# Altium PCB Version2AutoBanlancingRobot.PcbDoc
Units mil, origin at the board's own origin, x right, y up, seen from the top; angles counter-clockwise.
Board outline 2550 x 2885 mil, 2 copper layers (Top Layer, Bottom Layer); 34 components, 29 nets, 167 pads, 6 vias.
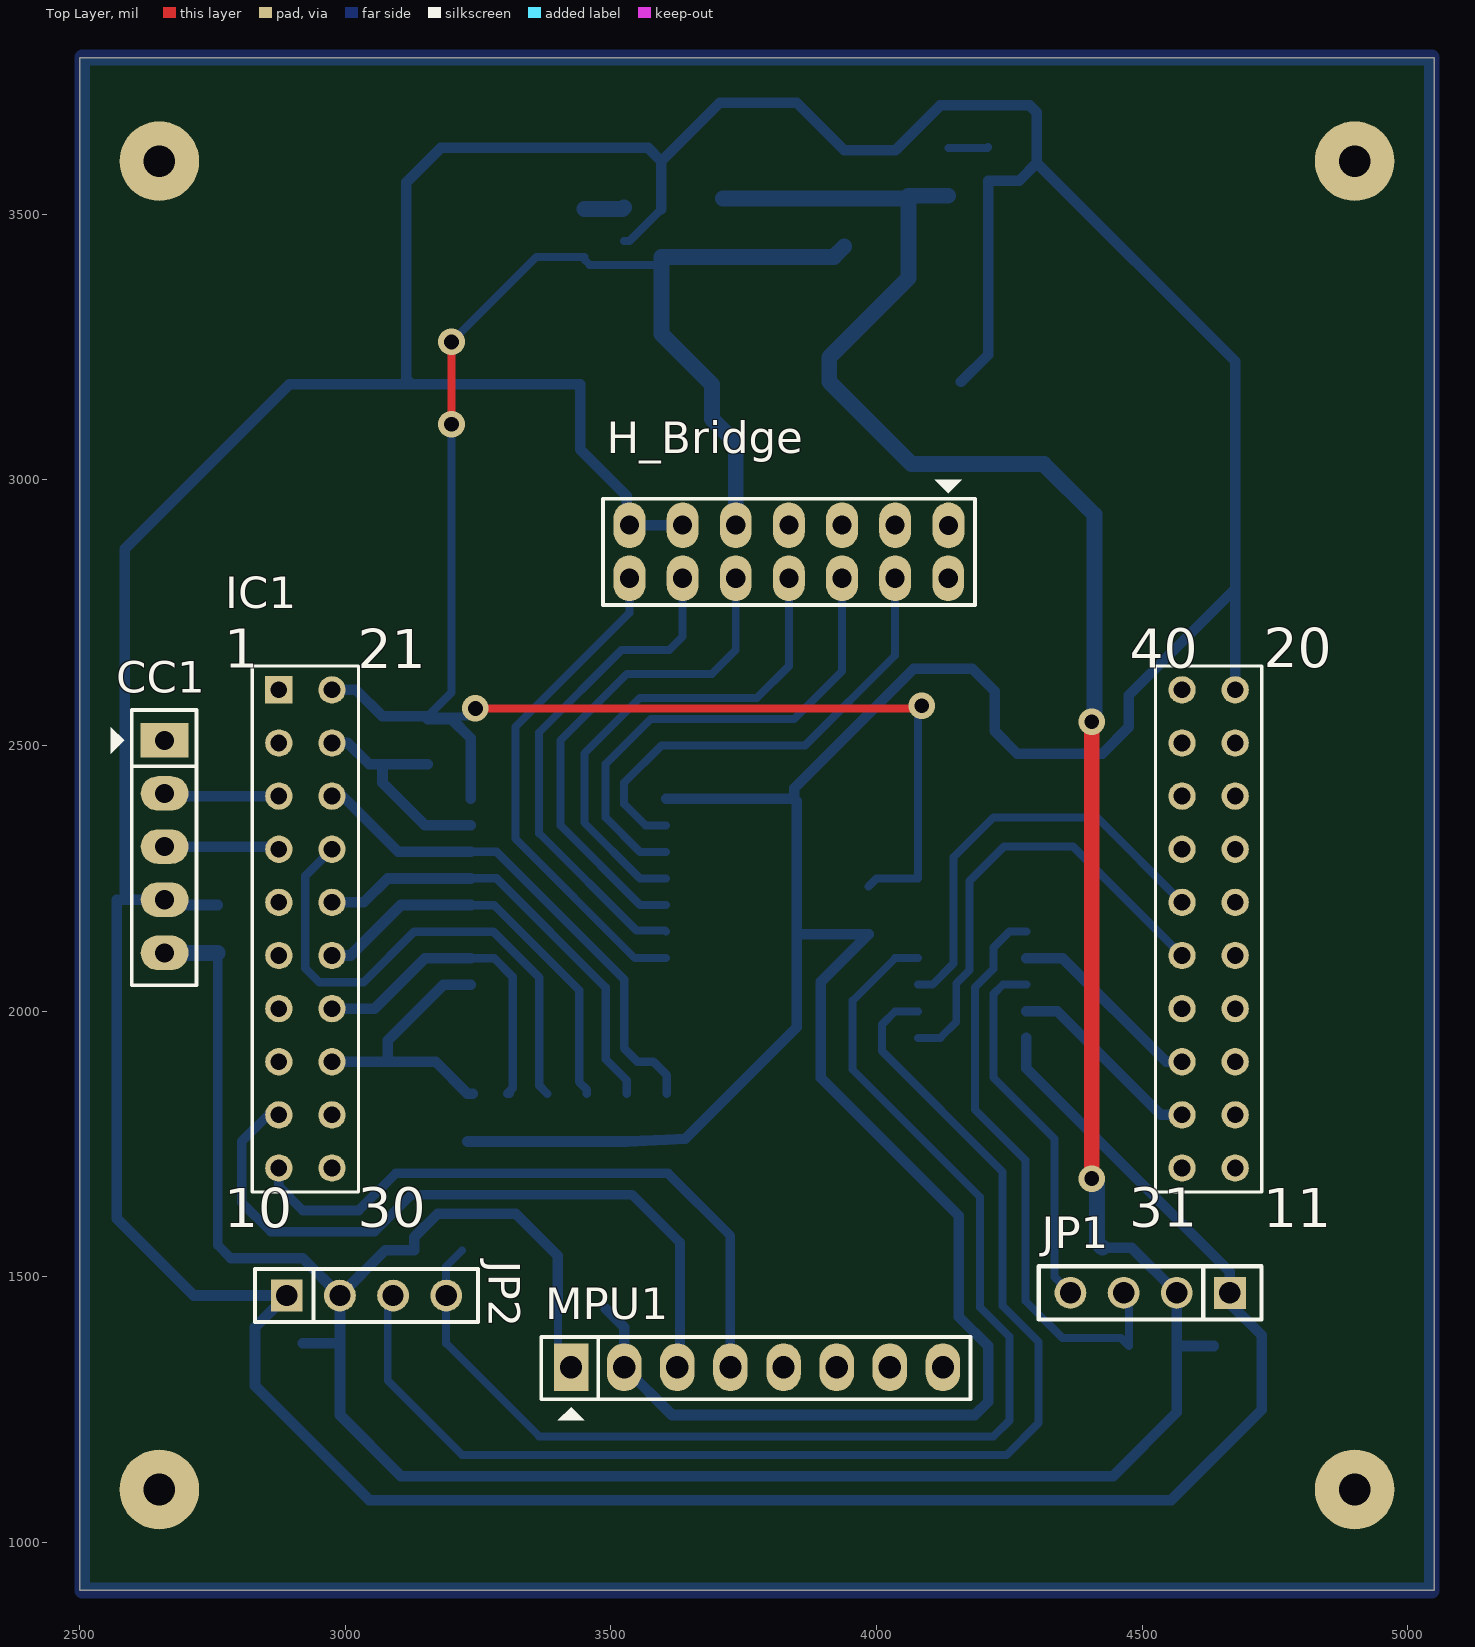
[diagram p0: Top Layer view]
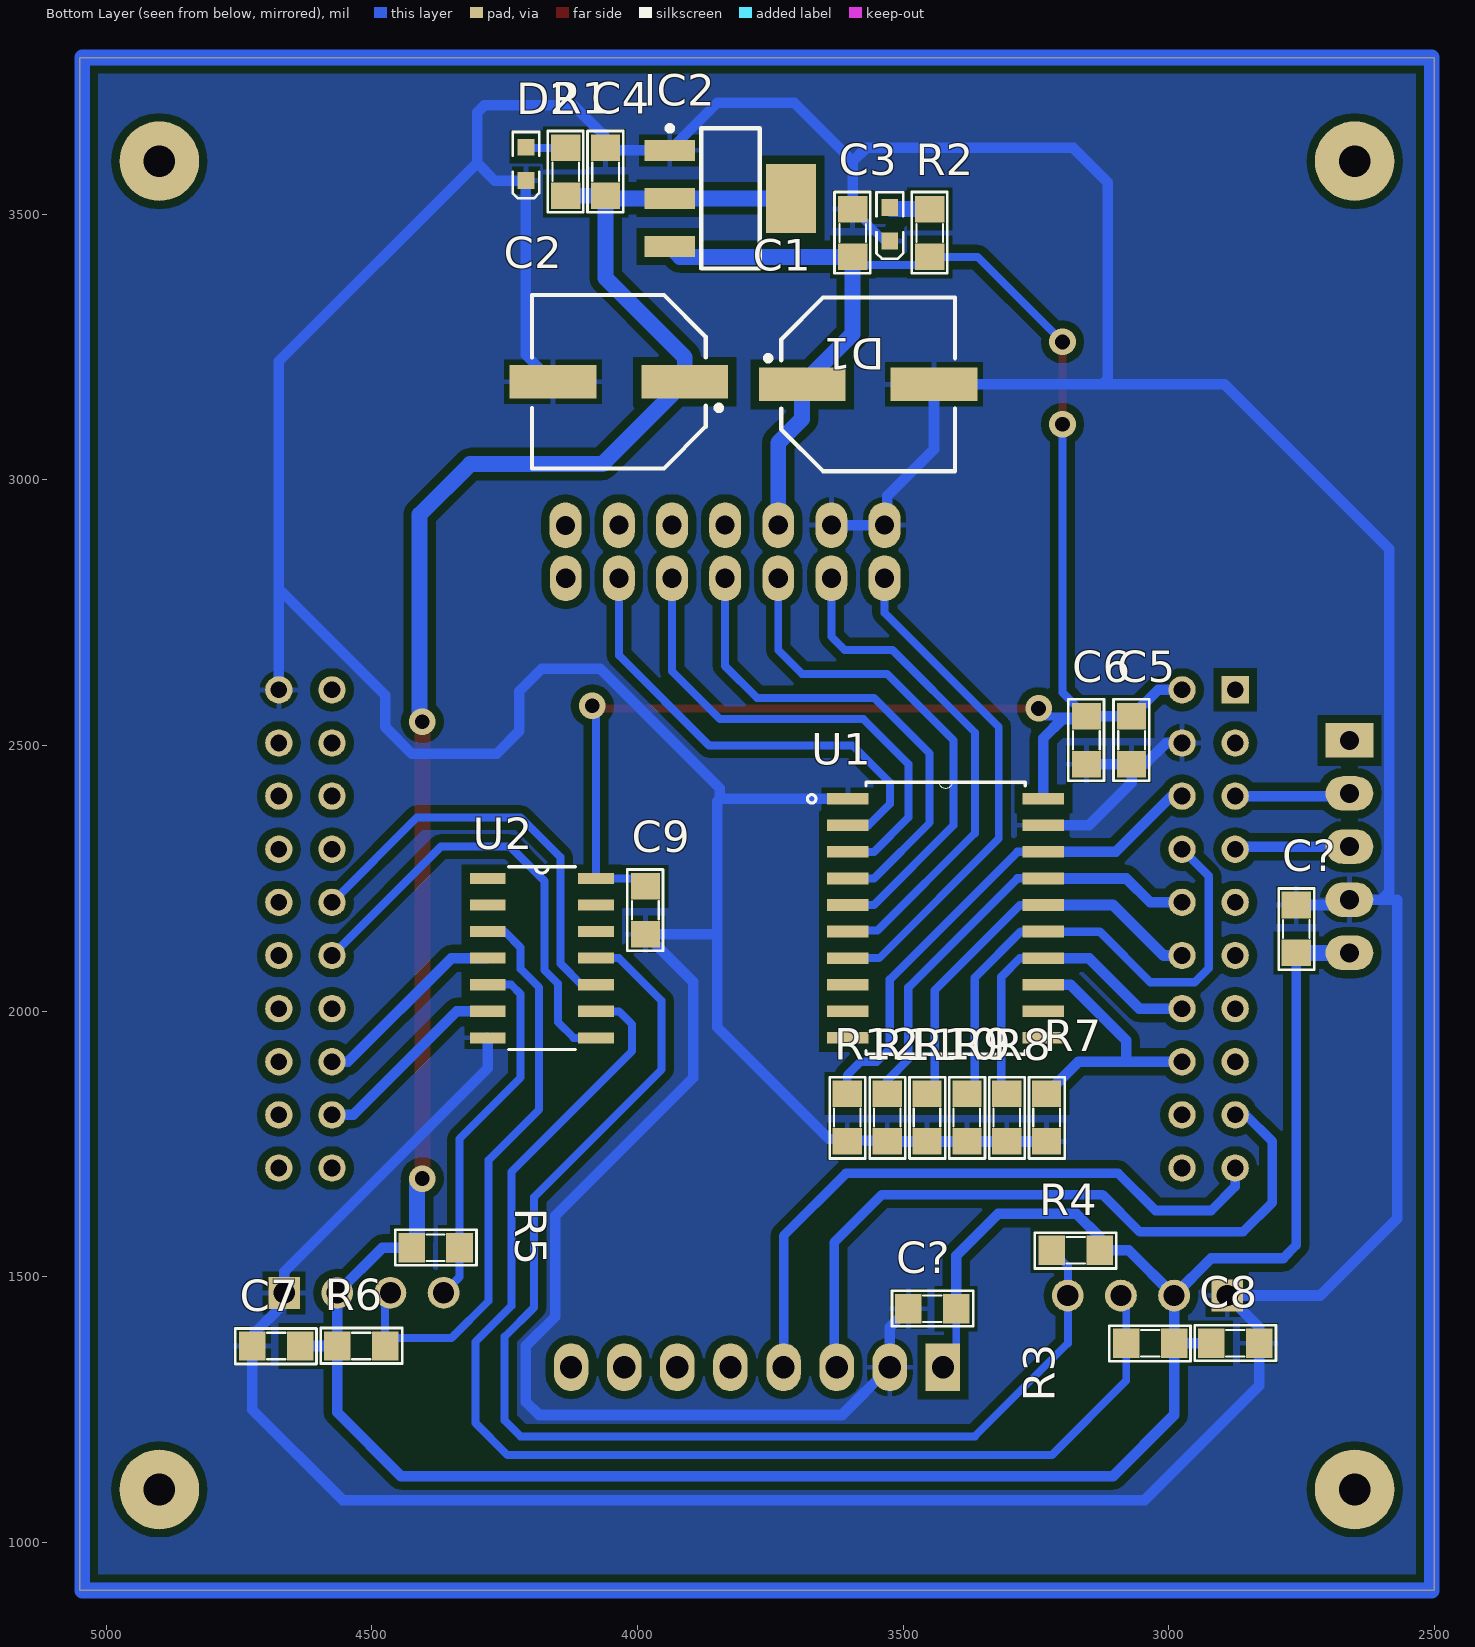
[diagram p1: Bottom Layer view, seen from below]
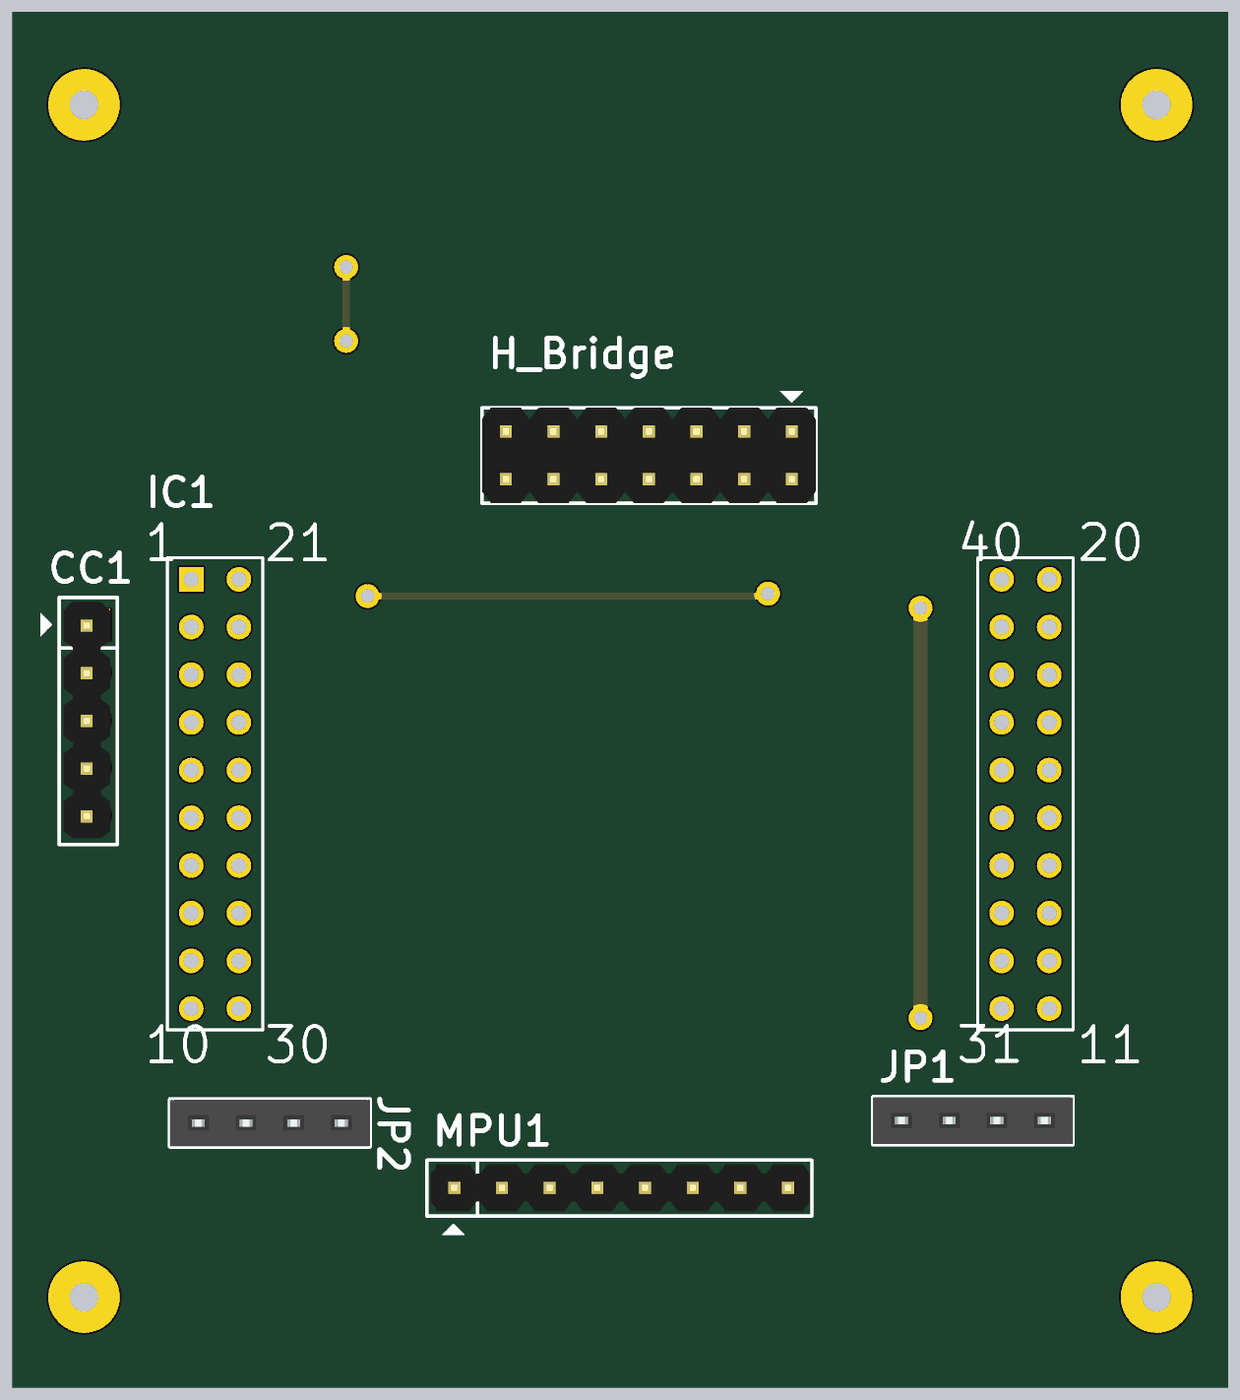
[diagram p2: 3D render of the assembled board from above, using the file's embedded part models]
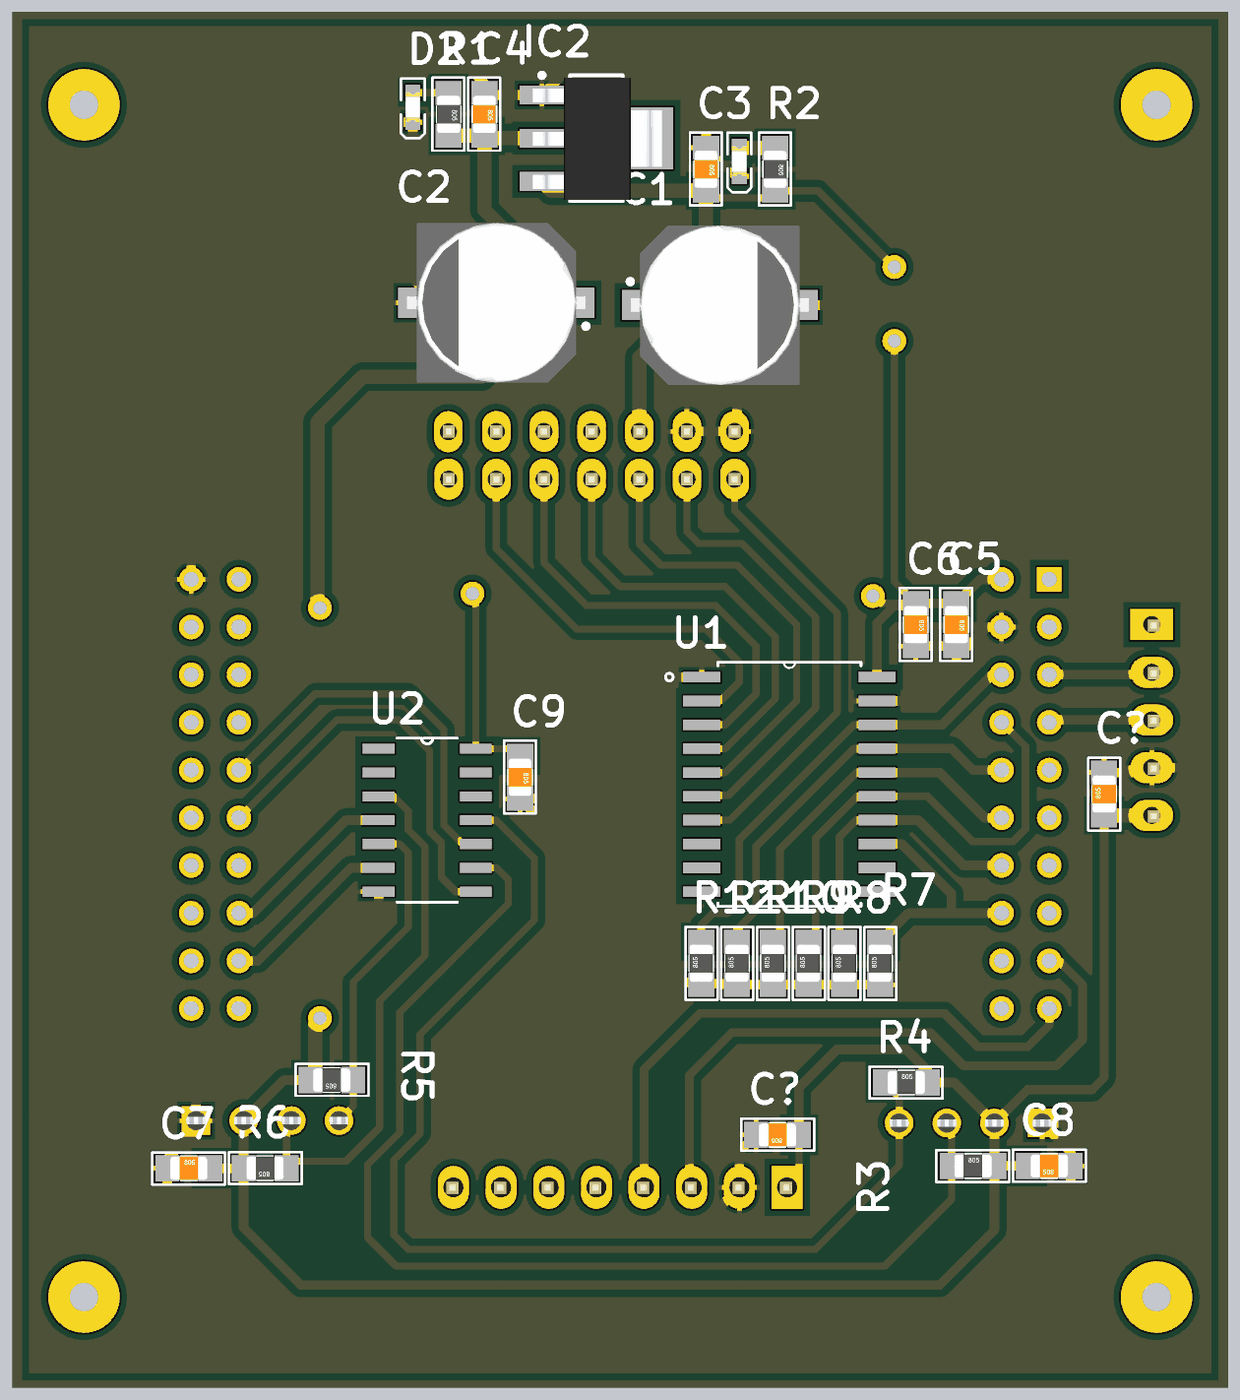
[diagram p3: 3D render of the assembled board from below, using the file's embedded part models]

## Layer stack, top to bottom
Top Solder: solder mask 0.4, Solder Resist, Dk 3.5
Top Layer: signal copper 1.4
Dielectric 1: dielectric 12.6, FR-4, Dk 4.8
Bottom Layer: signal copper 1.4
Bottom Solder: solder mask 0.4, Solder Resist, Dk 3.5

## Board outline
2500,910 2500,3795 5050,3795 5050,910

## Design rules (kind name [scope] priority, off if disabled: settings)
Clearance [All] p1: gap=13 ignorepadtopadclearanceinfootprint=FALSE
PolygonConnect [All] p1: connectstyle=Relief reliefconductorwidth=10 reliefentries=4 polygonreliefangle="90 Angle" airgapwidth=10
RoutingVias [All] p1: holewidth=28 width=50 viastyle="Through Hole" minholewidth=28 minwidth=50 maxholewidth=28 maxwidth=50
SolderMaskExpansion [All] p1: expansion=4
Width [All] p1: maxlimit=30 minlimit=15 preferedwidth=20 minimp=50.000000 maximp=50.000000 favimp=50.000000
30 further rules are at their usual default settings.

## Components (designator, comment, footprint, x,y, rotation, side; value= is the part's Value field where it differs from the comment)
C1 "Cap Pol SMD" "CAP ALU SIZE C" 3565.98,3180 r180 bottom value=100uF
C2 "Cap Pol SMD" "CAP ALU SIZE C" 4035,3185 r0 bottom value=100uF
C3 "Cap Non-Pol SMD" CAP-SM-0805 3595,3510 r270 bottom value=100nF
C4 "Cap Non-Pol SMD" CAP-SM-0805 4060,3625 r270 bottom value=100nF
C5 "Cap Non-Pol SMD" CAP-SM-0805 3070,2555 r270 bottom
C6 "Cap Non-Pol SMD" CAP-SM-0805 3155,2555 r270 bottom
C7 "Cap Non-Pol SMD" CAP-SM-0805 4725,1370 r180 bottom
C8 "Cap Non-Pol SMD" CAP-SM-0805 2830,1375 r0 bottom
C9 "Cap Non-Pol SMD" CAP-SM-0805 3985,2235 r270 bottom
C? "Cap Non-Pol SMD" CAP-SM-0805 3400,1440 r0 bottom value=100nF
C? "Cap Non-Pol SMD" CAP-SM-0805 2760,2110 r90 bottom value=100nF
CC1 "Header 5" JP5 2660,2510 r270 top
D1 "LED SMD" LED_0603_Blue 3525,3481.5 r270 bottom
D2 "LED SMD" LED_0603_Blue 4210,3595 r270 bottom
H_Bridge "Header 7X2" JP7X2 4135,2915 r180 top
IC1 "EK-TM4C123GXL" TM4C123LAUNCHPAD 3775,2105 r0 top locked
IC2 "LM1117" SOT223-4N 3825,3530 r180 bottom value=LM317
JP1 "JP4" JP4-C1T 4665,1470 r180 top
JP2 "JP4" JP4-C1T 2890,1465 r0 top
MPU1 "Header 8" JP8 3425,1330 r0 top
R1 "Res SMD" RES-SM-0805 4135,3625 r270 bottom value=1K
R2 "Res SMD" RES-SM-0805 3450,3510 r270 bottom value=1K
R3 "Res SMD" RES-SM-0805 3080,1375 r180 bottom value=1K
R4 "Res SMD" RES-SM-0805 3220,1550 r180 bottom value=1K
R5 "Res SMD" RES-SM-0805 4335,1555 r0 bottom value=1K
R6 "Res SMD" RES-SM-0805 4475,1370 r0 bottom value=1K
R7 "Res SMD" RES-SM-0805 3230,1755 r90 bottom value=1K
R8 "Res SMD" RES-SM-0805 3305,1755 r90 bottom value=1K
R9 "Res SMD" RES-SM-0805 3380,1755 r90 bottom value=1K
R10 "Res SMD" RES-SM-0805 3455,1755 r90 bottom value=1K
R11 "Res SMD" RES-SM-0805 3530,1755 r90 bottom value=1K
R12 "Res SMD" RES-SM-0805 3605,1755 r90 bottom value=1K
U1 "SN74HC245DWR" SOIC127P1030X265-20N 3420,2175 r180 bottom
U2 "74HC14D" SOIC127P600X175-14N 4180,2100 r180 bottom locked

## Footprints (in the part's own frame and the unit in brackets; to place one, negate y for a bottom-side part, rotate by r counter-clockwise, add the part's x,y. Pads: shape width x height; smd on the part's side, far side on the other; paste and mask are expansions set on the pad)
"CAP ALU SIZE C" [mm] "Capacitor, Aluminium Electrolytric, 8.3mm L X 8.3mm W X 6.2mm H, IPC Medium Density"
  rect 4.15x1.6 smd: 1(-3.15,0) 2(3.15,0)
  silkscreen extent -4.9,-4.15 4.15,4.15, body extent -4.75,-4.25 4.75,4.25, height 6.2
CAP-SM-0805 [mil]
  rect 50x55 smd: 1(0,0) 2(90,0)
  silkscreen extent -32,-34 121,33, body extent 6,-25 84,25, height 31
JP4-C1T [mm] "4 row, straight, gold plating"
  rect 1.52x1.52 hole 1.02: 1(0,0)
  round 1.52 hole 1.02: 2(2.54,0) 3(5.08,0) 4(7.62,0)
  silkscreen extent -1.52,-1.27 9.14,1.27, body extent -1.52,-1.25 9.14,1.25, height 8.51
JP5 [mil] "JP5"
  rect 65x90 hole 36: 1(0,0)
  oval 65x90 hole 36: 2(100,0) 3(200,0) 4(300,0) 5(400,0)
  silkscreen extent -57,-101 461,60, body extent -48,-53 448,45, height 323
JP7X2 [mil]
  oval 60x86 hole 36: 1(-0.5,0.5) 2(0,100) 3(100,0) 4(100,100) 5(200,0) 6(200,100) 7(300,0) 8(300,100) 9(400,0) 10(400,100) 11(500,0) 12(500,100) 13(600,0) 14(600,100)
  silkscreen extent -51,-85 650,151, body extent -50,-50 650,150, height 335
JP8 [mil] "JP8"
  rect 65x90 hole 42: 1(0,0)
  oval 65x90 hole 42: 2(100,0) 3(200,0) 4(300,0) 5(400,0) 6(500,0) 7(600,0) 8(700,0)
  silkscreen extent -56,-100 752,57, body extent -48,-50 748,48, height 323
LED_0603_Blue [mm] "Chip LED, 2-Leads, Body 1.6x0.8mm, IPC Medium Density"
  rect 0.8x0.8 smd: 1(-0.8,0) 2(0.8,0)
  silkscreen extent -1.52,-0.64 1.65,0.64, body extent -0.8,-0.4 0.8,0.4, height 0.7
RES-SM-0805 [mil]
  rect 50x55 smd: 1(0,0) 2(90,0)
  silkscreen extent -32,-34 121,33, body extent 6,-25 84,25, height 31
SOIC127P600X175-14N [mil]
  rect 67x21 smd: 1(-102,150) 2(-102,100) 3(-102,50) 4(-102,0) 5(-102,-50) 6(-102,-100) 7(-102,-150) 8(102,-150) 9(102,-100) 10(102,-50) 11(102,0) 12(102,50) 13(102,100) 14(102,150)
  silkscreen extent -63,-172 63,172
SOIC127P1030X265-20N [mil]
  rect 78x22 smd: 1(-184,225) 2(-184,175) 3(-184,125) 4(-184,75) 5(-184,25) 6(-184,-25) 7(-184,-75) 8(-184,-125) 9(-184,-175) 10(-184,-225) 11(184,-225) 12(184,-175) 13(184,-125) 14(184,-75) 15(184,-25) 16(184,25) 17(184,75) 18(184,125) 19(184,175) 20(184,225)
  silkscreen extent -260,-256 150,256
SOT223-4N [mm] "SOT223, 4-Leads, Body 6.5x3.5mm, Pitch 2.3mm, Lead Span 7mm, IPC Medium Density"
  rect 2.4x1 smd: 1(-2.9,2.3) 2(-2.9,0) 3(-2.9,-2.3)
  rect 2.4x3.3 smd: 4(2.9,0)
  silkscreen extent -3.03,-3.35 1.4,3.47, body extent -3.39,-3.27 3.5,3.23, height 1.72
TM4C123LAUNCHPAD [mm]
  rect 1.308x1.308 hole 0.8: 1(-22.86,12.7)
  round 1.308 hole 0.8: 2(-22.86,10.16) 3(-22.86,7.62) 4(-22.86,5.08) 5(-22.86,2.54) 6(-22.86,0) 7(-22.86,-2.54) 8(-22.86,-5.08) 9(-22.86,-7.62) 10(-22.86,-10.16) 11(22.86,-10.16) 12(22.86,-7.62) 13(22.86,-5.08) 14(22.86,-2.54) 15(22.86,0) 16(22.86,2.54) 17(22.86,5.08) 18(22.86,7.62) 19(22.86,10.16) 20(22.86,12.7) 21(-20.32,12.7) 22(-20.32,10.16) 23(-20.32,7.62) 24(-20.32,5.08) 25(-20.32,2.54) 26(-20.32,0) 27(-20.32,-2.54) 28(-20.32,-5.08) 29(-20.32,-7.62) 30(-20.32,-10.16) 31(20.32,-10.16) 32(20.32,-7.62) 33(20.32,-5.08) 34(20.32,-2.54) 35(20.32,0) 36(20.32,2.54) 37(20.32,5.08) 38(20.32,7.62) 39(20.32,10.16) 40(20.32,12.7)
  silkscreen extent -24.13,-11.3 24.13,13.84

## Part data
C1 C2: "Polarized Capacitor (Radial)"
C3 C4 C5 C6 C7 C8 C9 C? C?: "Capacitor"
CC1: "Header, 5-Pin", LatestRevisionDate=17-Jul-2002, LatestRevisionNote="Re-released for DXP Platform.", Publisher="Altium Limited"
D1 D2: "LED"
H_Bridge: "Header, 7-Pin, Dual row", LatestRevisionDate=17-Jul-2002, LatestRevisionNote="Re-released for DXP Platform.", Publisher="Altium Limited"
IC1: "Evaluation Kit For ARM Cortex-M4F-based Microcontrollers", Package=None, Availability=Good, MF="Texas Instruments", MP=EK-TM4C123GXL, Price="22.22 USD", SnapEDA_Link=https://www.snapeda.com/parts/EK-TM4C123GXL/Texas%2520Instruments/view-part/?ref=snap
IC2: "Available in 1.8V, 2.5V, 2.85V, 3.3V, 5V, and  Adjustable Versions"
JP1 JP2: "WR-PHD 2.54 mm Angled Socket Header", Manufacturer="Würth Elektronik eiSos GmbH", partNo=613004143121, ComponentLink1 Description=Manufacturer, ComponentLink1URL=http://www.we-online.com, ComponentLink2 Description=Datasheet, ComponentLink2URL=http://katalog.we-online.de/em/datasheet/6130xx143121.pdf, Created by="Karrer Zheng", Created Date="29 March 2013", NoPins=04
MPU1: "Header, 8-Pin", LatestRevisionDate=17-Jul-2002, LatestRevisionNote="Re-released for DXP Platform.", Publisher="Altium Limited"
R1 R2 R3 R4 R5 R6 R7 R8 R9 R10 R11 R12: "Resistor"
U1: "Logic IC - Receiver, transceiver Texas Instruments SN74HC245DWR SOIC 20", Package="SOIC-20 Texas Instruments", Availability=Unavailable, MF="Texas Instruments", MP=SN74HC245DWR, Price=None, SnapEDA_Link=https://www.snapeda.com/parts/SN74HC245DWR/Texas%20Instruments/view-part/?ref=snap
U2: "74HC CMOS logic IC series SOIC14 Hex Schmitt Inverter", Package="SOIC-14 Toshiba", Availability=Unavailable, MF="Toshiba Semiconductor", MP=74HC14D, Price=None, SnapEDA_Link=https://www.snapeda.com/parts/74HC14D/Toshiba%20Semiconductor%20and%20Storage/view-part/?ref=snap

## Free pads (board coordinates)
  round 150 hole 60: 2(2650,1100) 2(2650,3600) 2(4900,1100) 2(4900,3600)

## Via types
v1: diameter 50, hole 28, Top Layer to Bottom Layer, 6 vias

## Nets (pads, with @x,y where several pads share a name; then routed paths per layer and width w, separated by ;. In a path a pad name is that pad's centre, name@x,y a point inside that pad or via, vN(x,y) a via of type N, cw(c..) or ccw(c..) an arc to the next point about the centre after c; other vN are vias at no path point)
3V3: C2.1 C4.2 C7.2 C8.2 C?.1 CC1.5 IC2.2 IC2.4 JP1.2 JP2.2 MPU1.1 R1.2 R3.2 R4.2 R5.2 R6.2 | length 6933.4
  Top Layer w30: v1(4405,1685) 4410,1690 4405,1695 v1(4405,2545)
  Bottom Layer w15: C?.1@3400,1440 3400,1355 MPU1.1
  Bottom Layer w18: C?.1@2760,2110 2760,1560 2785,1535
  Bottom Layer w20: 2785,1535 2920,1535 JP2.2 ; C8.2 R3.2 ; C?.1@3400,1440 3400,1540 3321,1619 3174,1619 3130,1575 R4.2 3075,1550 JP2.2 ; C4.2@4055,3530 C4.2 ; R5.2 4480,1555 JP1.2 R6.2 ; C7.2 R6.2 ; R3.2 JP2.2 ; R3.2 2990,1240 3105,1125 4445,1125 4565,1245 R6.2
  Bottom Layer w30: CC1.5 C?.1@2760,2110 ; IC2.4 IC2.2 C4.2@4055,3530 ; R1.2 C4.2 4060,3380 3910.98,3230.98 C2.1 4065.98,3030 4315,3030 4410,2935 4410,2550 v1(4405,2545) ; v1(4405,1685) 4415,1675 4415,1565 R5.2
"ENC A1": JP1.4 R5.1 U2.5 | length 691.8
  Bottom Layer w15: U2.5 4237.6,2050 4220,2032.4 4220,1875 4335,1760 R5.1 4335,1500 JP1.4
"ENC A2": JP2.4 R4.1 U2.11 | length 2400.7
  Bottom Layer w15: R4.1 3190,1520 JP2.4 3190,1375 3365,1200 4220,1200 4250,1230 4250,1387.57 4195,1442.57 4195,1650 3955,1890 3955,2020 4035,2100 U2.11
"ENC B1": JP1.3 R6.1 U2.3 | length 1127.6
  Bottom Layer w15: U2.3 4250,2150 4220,2120 4220,2080 4185,2045 4185,1815 4280,1720 4280,1455 4350,1385 4460,1385 R6.1 4475,1460 JP1.3
"ENC B2": JP2.3 R3.1 U2.9 | length 2422.5
  Bottom Layer w15: JP2.3 3080,1455 R3.1 3080,1305 3220,1165 4245,1165 4305,1225 4305,1377.83 4237.5,1445.33 4237.5,1697.5 4010,1925 4010,1975 4035,2000 U2.9
"ENC OUT A1": IC1.32 U2.6 | length 373.8
  Bottom Layer w20: U2.6 4340,2000 4535,1805 IC1.32
"ENC OUT A2": IC1.36 U2.10 | length 811
  Bottom Layer w15: U2.10 4105.15,2050 4145,2089.85 4145,2290 4220,2365 4415,2365 IC1.36
"ENC OUT B1": IC1.33 U2.4 | length 373.8
  Bottom Layer w20: U2.4 4350,2100 4545,1905 IC1.33
"ENC OUT B2": IC1.35 U2.8 | length 871.6
  Bottom Layer w15: U2.8 4120,1950 4150,1980 4150,2052.43 4175,2077.43 4175,2245 4240,2310 4370,2310 IC1.35
GND: C1.2 C2.2 C3.1 C4.1 C5.2 C6.2 C7.1 C8.1 C9.2 C?.2 CC1.4 D1.2 D2.2 H_Bridge.11 H_Bridge.13 IC1.20 IC1.22 IC2.1 JP1.1 JP2.1 MPU1.2 R7.1 R8.1 R9.1 R10.1 R11.1 R12.1 U1.1 U1.19 U2.7 | length 15092.5
  Bottom Layer w15: D1.2 3535,3450 C3.1
  Bottom Layer w20: C?.2@2760,2200 2670,2200 CC1.4 2600,2210 ; IC1.22 3005,2505 3045,2465 C5.2 ; C6.2 C5.2 ; R7.1 R8.1 R9.1 R10.1 R11.1 3604.85,1758.4 3640,1760 3850,1970 3850,2145 ; U1.19 3150,2350 3070,2430 C5.2 ; C?.2@3490,1440 3525,1405 MPU1.2 3615,1240 4185,1240 4210,1265 4210,1370 4155,1425 4155,1615 3895,1875 3895,2055 C9.2 3850,2145 ; C3.1 3595,3600 ; U1.1 3845,2400 ; H_Bridge.11 H_Bridge.13 3530,2920 3530,2970 3441.97,3058.03 C1.2 3125,3180 ; C2.2 4210,3235.98 D2.2 4268.5,3563.5 4301.75,3596.75 ; U2.7 4282,1893 4665,1510 JP1.1 4665,1450 4725,1390 C7.1 4725,1250 4555,1080 3045,1080 2830,1295 C8.1 2830,1405 JP2.1 2715,1465 2570,1610 2570,2210 2600,2210 ; IC1.20 4675,2795 ; 2600,2210 2585,2225 2585,2870 2895,3180 3125,3180 ; 3125,3180 3115,3190 3115,3560 3180,3625 3570,3625 3595,3600 ; 3595,3600 3705,3710 3849.72,3710 IC2.1 4035.55,3620.55 4120,3705 4288.5,3705 4301.75,3691.75 4301.75,3596.75 ; 3845,2400 3845,2420 4070,2645 4180,2645 4222.5,2602.5 4222.5,2527.5 4265,2485 4425,2485 4475,2535 4475,2595 4675,2795 ; 3845,2400 3850,2395 3850,2145 ; 4301.75,3596.75 4675,3223.5 4675,2795
NetD1_1: D1.1 R2.1 | length 76.2
  Bottom Layer w30: R2.1 3522.01,3510 D1.1
NetD2_1: D2.1 R1.1 | length 75.6
  Bottom Layer w15: R1.1 4208.5,3625 D2.1
PWMA: IC1.23 R12.2 U1.18 | length 958.6
  Bottom Layer w16: U1.18 3285,2300 3525,2060 3525,1930 3550,1905 3580,1905 3605,1880 R12.2
  Bottom Layer w20: IC1.23 2995,2405 3100,2300 U1.18
PWMA_H: H_Bridge.4 U1.2 | length 890.3
  Bottom Layer w15: U1.2 3565,2350 3525,2390 3525,2430.5 3595,2500.5 3865.5,2500.5 4035,2670 H_Bridge.4
PWMB: IC1.26 R10.2 U1.16 | length 771.8
  Bottom Layer w16: U1.16 3280,2200 3440,2040 3440,1867.2 3455,1852.2 R10.2
  Bottom Layer w20: IC1.26 3010,2105 3105,2200 U1.16
PWMB_H: H_Bridge.8 U1.4 | length 945.8
  Bottom Layer w15: U1.4 3555,2250 3450,2355 3450,2485 3555,2590 3775,2590 3835,2650 H_Bridge.8
PWMC: IC1.24 R9.2 U1.15 | length 995.6
  Bottom Layer w16: IC1.24 2925,2255 2925,2080.64 2950.64,2055 3035,2055 3130,2150 U1.15 3278.5,2150 3365,2063.5 3365,1860 R9.2
PWMC_H: H_Bridge.10 U1.5 | length 956.5
  Bottom Layer w15: U1.5 3555,2200 3405,2350 3405,2510 3530,2635 3690,2635 3735,2680 H_Bridge.10
PWMD: IC1.28 R7.2 U1.13 | length 529.3
  Bottom Layer w20: IC1.28 3080,1905 ; U1.13 3185,2050 3080,1945 3080,1905 ; R7.2@3240,1845 R7.2 3170,1905 3080,1905
PWMD_H: H_Bridge.14 U1.7 | length 956.3
  Bottom Layer w15: H_Bridge.14 3535,2750 3320,2535 3320,2325 3545,2100 U1.7
RSTA: IC1.25 R11.2 U1.17 | length 835.1
  Bottom Layer w16: U1.17 3285,2250 3490,2045 3490,1910 3530,1870 R11.2
  Bottom Layer w20: IC1.25 3035,2205 3080,2250 U1.17
RSTA_H: H_Bridge.6 U1.3 | length 933.4
  Bottom Layer w15: U1.3 3555,2300 3490,2365 3490,2465 3575,2550 3845,2550 3935,2640 H_Bridge.6
RSTC: IC1.27 R8.2 U1.14 | length 623
  Bottom Layer w16: U1.14 3280,2100 3315,2065 3315,1855 R8.2 R8.2@3310,1845
  Bottom Layer w20: IC1.27 3055,2005 3150,2100 U1.14
RSTC_H: H_Bridge.12 U1.6 | length 960.2
  Bottom Layer w15: U1.6 3602,2152 3548,2152 3365,2335 3365,2525 3520,2680 3610,2680 3635,2705 H_Bridge.12
RXD: CC1.3 IC1.4 | length 217.1
  Bottom Layer w20: CC1.3 2870,2310 IC1.4
SCL: IC1.9 MPU1.3 | length 1356.8
  Bottom Layer w18: IC1.9 2855,1805 2805,1755 2805,1640 2860,1585 3055,1585 3125,1655 3540,1655 3630,1565 3630,1335 MPU1.3
SDA: IC1.10 MPU1.4 | length 1228.8
  Bottom Layer w18: IC1.10 2875,1670 2920,1625 3025,1625 3095,1695 3607.5,1695 3725,1577.5 MPU1.4
TXD: CC1.2 IC1.3 | length 217.1
  Bottom Layer w20: CC1.2 2665,2405 IC1.3
VCC: C1.1 C3.2 C5.1 C6.1 C9.1 H_Bridge.9 IC1.21 IC2.3 R2.2 U1.20 U2.14 | length 3900.6
  Top Layer w15: v1(3200,3105) 3195,3110 3200,3115 v1(3200,3260) ; v1(3245,2570) 4080,2570 v1(4085,2575)
  Bottom Layer w15: v1@3195,3255 v1(3200,3260) 3360,3420 R2.2 3450,3415 3460,3405 3585,3405 C3.2@3595,3395 ; v1(3200,3105) 3200,2600 C6.1 3230,2555 v1(3245,2570) ; C9.1 4000,2250 U2.14 4078,2568 v1(4085,2575)
  Bottom Layer w20: IC1.21 3020,2605 C5.1 C6.1 ; C6.1@3155,2550 3200,2550 3236,2514 U1.20
  Bottom Layer w30: H_Bridge.9 3735,3070 3690,3115 C1.1 3595,3275 3595,3395 C3.2 3919.72,3420 IC2.3
pads on no net: CC1.1 H_Bridge.1 H_Bridge.2 H_Bridge.3 H_Bridge.5 H_Bridge.7 IC1.1 IC1.2 IC1.5 IC1.6 IC1.7 IC1.8 IC1.11 IC1.12 IC1.13 IC1.14 IC1.15 IC1.16 IC1.17 IC1.18 IC1.19 IC1.29 IC1.30 IC1.31 IC1.34 IC1.37 IC1.38 IC1.39 IC1.40 MPU1.5 MPU1.6 MPU1.7 MPU1.8 U1.8 U1.9 U1.10 U1.11 U1.12 U2.1 U2.2 U2.12 U2.13
copper on no net: | length 10850
  Bottom Layer w30: 2505,910 2505,3795 5045,3795 5045,910 2505,910

## Polygon pours and split planes (outlines as drawn)
GND on Bottom Layer "NONET_L02_P-001" (solid, remove dead copper, pour order 12): 2505,3795 5040,3795 5045,3790 5045,910 2505,910

## Text inside footprints (layer, text, board x,y; h text height)
IC1: Top Overlay "1" at 2772.09,2646.76 h73.82; Top Overlay "10" at 2772.44,1593.88 h73.82; Top Overlay "11" at 4727.59,1593.8 h73.82; Top Overlay "20" at 4728.41,2647.13 h73.82; Top Overlay "21" at 3023.71,2646.1 h73.82; Top Overlay "30" at 3023.48,1594.14 h73.82; Top Overlay "31" at 4475.54,1594.77 h73.82; Top Overlay "40" at 4476.93,2646.68 h73.82